# Altium PCB power-v2.2.PcbDoc (part 1 of 2)
Units mil, origin at the board's own origin, x right, y up, seen from the top; angles counter-clockwise.
Board outline 6000 x 4000 mil, 2 copper layers (Top Layer, Bottom Layer); 125 components, 68 nets, 351 pads, 6 vias.
Unrouted connection lines stored in the file: 252.
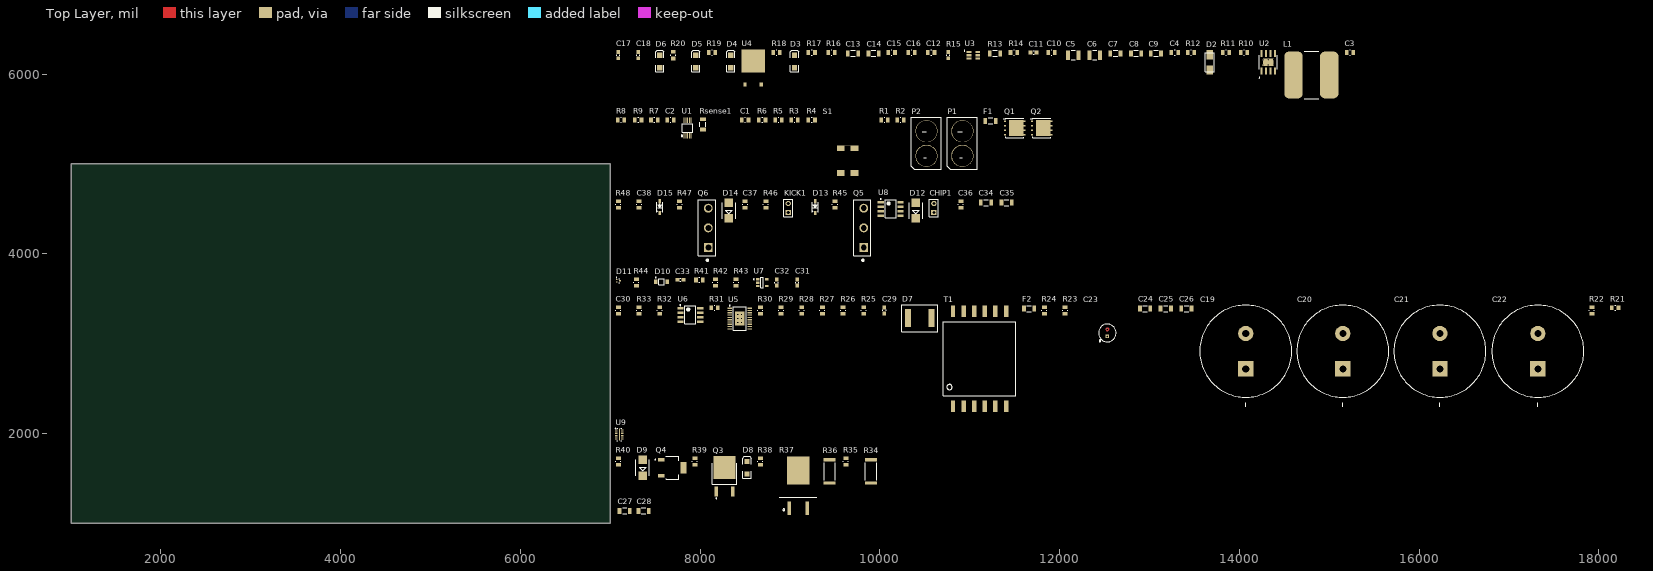
[diagram p0: Top Layer view]
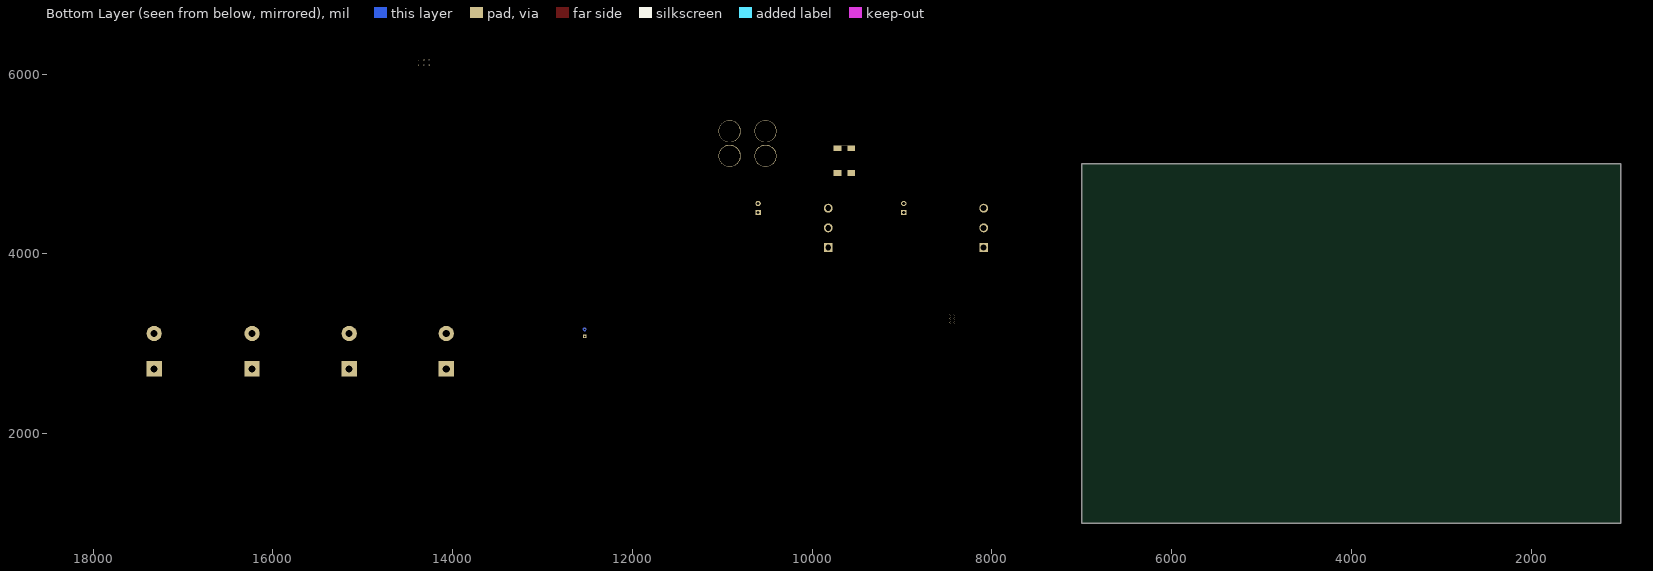
[diagram p1: Bottom Layer view, seen from below]

## Layer stack, top to bottom
Top Solder: solder mask 0.4, Solder Resist, Dk 3.5
Top Layer: signal copper 1.4
Dielectric 1: dielectric 12.6, FR-4, Dk 4.8
Bottom Layer: signal copper 1.4
Bottom Solder: solder mask 0.4, Solder Resist, Dk 3.5

## Board outline
1000,1000 7000,1000 7000,5000 1000,5000

## Design rules (kind name [scope] priority, off if disabled: settings)
BoardOutlineClearance [All] p1: gap=7.87 ignorepadtopadclearanceinfootprint=FALSE except(15.75: Arc-SplitBarrior Arc-SplitContinuation Track-SplitBarrior Track-SplitContinuation SMDPad-SplitBarrior SMDPad-SplitContinuation THPad-SplitBarrior THPad-SplitContinuation Via-SplitBarrior Via-SplitContinuation Fill-SplitBarrior Fill-SplitContinuation Poly-SplitBarrior Poly-SplitContinuation Region-SplitBarrior Region-SplitContinuation Text-SplitBarrior Text-SplitContinuation)
Clearance "Clearance Bottom Layer" [OnLayer('Bottom Layer')] p1: gap=8 ignorepadtopadclearanceinfootprint=TRUE except(10: Arc-Text Track-Text SMDPad-Text THPad-Text Via-Text Fill-Text Poly-Text Region-Text Text-Text)
Clearance "Clearance Top Layer" [OnLayer('Top Layer')] p2: gap=8 ignorepadtopadclearanceinfootprint=TRUE except(10: Arc-Text Track-Text SMDPad-Text THPad-Text Via-Text Fill-Text Poly-Text Region-Text Text-Text)
Clearance [All] p3: gap=7.87 ignorepadtopadclearanceinfootprint=FALSE except(3.5: Arc-Arc Arc-Track Arc-SMDPad Track-Track Track-SMDPad SMDPad-SMDPad; 5: Arc-Via Track-Via SMDPad-Via THPad-Via Via-Via; 10: Arc-Text Track-Text SMDPad-Text THPad-Text Via-Text Fill-Text Poly-Text Region-Text Text-Text)
HoleSize [All] p1: absolutevalues=TRUE maxlimit=248.03 minlimit=7.87 maxpercent=80.000 minpercent=20.000
MinimumAnnularRing [All] p1: minimumring=3
MinimumSolderMaskSliver [All] p1: minsoldermaskwidth=3.94
PolygonConnect PolygonConnect_1 [All] p1: thpad.connectstyle=Relief thpad.reliefconductorwidth=20 thpad.reliefentries=4 thpad.polygonreliefangle="90 Angle" thpad.airgapwidth=10 smdpad.connectstyle=Relief smdpad.reliefconductorwidth=20 smdpad.reliefentries=4 smdpad.polygonreliefangle="90 Angle" smdpad.airgapwidth=10 via.connectstyle=Direct via.reliefconductorwidth=20 via.reliefentries=4 via.polygonreliefangle="90 Angle" via.airgapwidth=10
RoomDefinition "Power Regulation" [InComponentClass('Power Regulation')] p1: confinementstyle=ConfineIn formatcopy=TRUE lockcomponents=FALSE outline 7050,5690 15310,5690 15310,6390 7050,6390
RoomDefinition "Power Input" [InComponentClass('Power Input')] p2: confinementstyle=ConfineIn formatcopy=TRUE lockcomponents=FALSE outline 7040,4770 11940,4770 11940,5640 7040,5640
RoomDefinition "Kicker and Chipper" [InComponentClass('Kicker and Chipper')] p3: confinementstyle=ConfineIn formatcopy=TRUE lockcomponents=FALSE outline 7040,3900 11510,3900 11510,4730 7040,4730
RoomDefinition HV-Measurement [InComponentClass('HV-Measurement')] p4: confinementstyle=ConfineIn formatcopy=TRUE lockcomponents=FALSE outline 7050,3600 9240,3600 9240,3860 7050,3860
RoomDefinition "Flyback Converter" [InComponentClass('Flyback Converter')] p5: confinementstyle=ConfineIn formatcopy=TRUE lockcomponents=FALSE outline 7040,2220 18280,2220 18280,3550 7040,3550
RoomDefinition "Connections and Communications" [InComponentClass('Connections and Communications')] p6: confinementstyle=ConfineIn formatcopy=TRUE lockcomponents=FALSE outline 7040,1910 7180,1910 7180,2170 7040,2170
RoomDefinition "Auto Discharge" [InComponentClass('Auto Discharge')] p7: confinementstyle=ConfineIn formatcopy=TRUE lockcomponents=FALSE outline 7040,1070 10000,1070 10000,1870 7040,1870
RoutingCorners [All] p1: cornerstyle=Round minsetback=100 maxsetback=100
RoutingVias [All] p1: holewidth=19.68 width=39.37 viastyle="Through Hole" minholewidth=7.87 minwidth=17.72 maxholewidth=39.37 maxwidth=78.74
SilkToSilkClearance [All] p1: silktosilkclearance=3.94
SilkToSolderMaskClearance [IsPad] p1: minsilkscreentomaskgap=3.94 clearancetoexposedcopper=TRUE
SolderMaskExpansion [All] p1: expansion=4 istentingtop=FALSE
Width [All] p1: maxlimit=100 minlimit=3.5 preferedwidth=15
25 further rules are at their usual default settings.

## Classes and differential pairs
component class "Power Regulation": C3 C4 C5 C6 C7 C8 C9 C10 C11 C12 C13 C14 C15 C16 C17 D2 D3 D4 D5 D6 L1 L2 R10 R11 R12 R13 R14 R15 R16 R17 R18 R19 R20 U2 U3 U4
component class "Power Input": C1 C2 D1 F1 P1 P2 Q1 Q2 R1 R2 R3 R4 R5 R6 R7 R8 R9 Rsense1 S1 U1
component class "Kicker and Chipper": C37 C38 CHIP1 D12 D13 D14 D15 KICK1 Q5 Q6 R45 R46 R47 R48 U8
component class HV-Measurement: C33 C38 D10 D11 R41 R42 R43 R44 U7
component class "Flyback Converter": C19 C20 C21 C22 C23 C24 C25 C26 C33 C38 D7 F2 R21 R22 R23 R24 R25 R26 R27 R28 R29 R30 R31 R32 R33 T1 U5 U6
component class "Connections and Communications": U9
component class "Auto Discharge": D8 D9 Q3 Q4 R34 R35 R36 R37 R38 R39 R40

## Components (designator, comment, footprint, x,y, rotation, side; value= is the part's Value field where it differs from the comment)
C1 "100nF 50V" 0805 8500,5490 r0 top value=100nF
C2 "100nF 50V" 0805 7670,5490 r0 top value=100nF
C3 "100nF 50V" 0805 15230,6240 r0 top value=100nF
C4 "8.2nF 50V" 0805 13280,6240 r0 top value=8.2nF
C5 "10uF 50V" 1210 12150,6210 r0 top value=10uF
C6 "10uF 50V" 1210 12390,6210 r0 top value=10uF
C7 "10UF 25V" 1206 12620,6230 r0 top value=10uF
C8 "10UF 25V" 1206 12850,6230 r0 top value=10uF
C9 "10UF 25V" 1206 13070,6230 r0 top value=10uF
C10 "2700pF 50V" 0805 11910,6240 r0 top value=2700pF
C11 "10pF" 0603 11710,6240 r0 top
C12 "100nF 50V" 0805 10570,6240 r0 top value=100nF
C13 "10UF 25V" 1206 9700,6230 r0 top value=10uF
C14 "10UF 25V" 1206 9930,6230 r0 top value=10uF
C15 "22uF 10V" 0805 10130,6240 r0 top value=22uF
C16 "22uF 10V" 0805 10350,6240 r0 top value=22uF
C17 "4.7uF" 0603 7090,6210 r90 top
C18 "4.7uF" 0603 7310,6210 r90 top
C19 "1000uF 250V" "RADIAL, CAN - THRU 25.4mm" 14070,2720 r90 top
C20 "1000uF 250V" "RADIAL, CAN - THRU 25.4mm" 15150,2720 r90 top
C21 "1000uF 250V" "RADIAL, CAN - THRU 25.4mm" 16230,2720 r90 top
C22 "1000uF 250V" "RADIAL, CAN - THRU 25.4mm" 17320,2720 r90 top
C23 "1000u" "RADIAL - THRU 5mm" 12530,3120 r90 top
C24 "10UF 25V" 1206 12950,3390 r0 top value=10uF
C25 "10UF 25V" 1206 13180,3390 r0 top value=10uF
C26 "10UF 25V" 1206 13410,3390 r0 top value=10uF
C27 "10UF 25V" 1206 7160,1140 r0 top value=10uF
C28 "10UF 25V" 1206 7370,1140 r0 top value=10uF
C29 "2.2uF" 0603 10050,3370 r90 top
C30 "10uF" 0805 7090,3370 r90 top
C31 "1.0uF" 0603 9080,3680 r90 top
C32 "0.010uF" 0603 8850,3680 r90 top
C33 "0.010uF" 0603 7780,3710 r0 top
C34 "10UF 25V" 1206 11180,4570 r0 top value=10uF
C35 "10UF 25V" 1206 11410,4570 r0 top value=10uF
C36 "0.1uF 25V" 0805 10900,4550 r90 top value=0.1uF
C37 "0.1uF 25V" 0805 8500,4550 r90 top value=0.1uF
C38 "0.1uF 25V" 0805 7320,4550 r90 top value=0.1uF
CHIP1 "Header 2" HDR1X2 10600,4460 r90 top
D2 "40V 3A" DO-214AC 13670,6130 r90 top
D3 "LED2" 3.2X1.6X1.1 9050,6140 r90 top
D4 "LED2" 3.2X1.6X1.1 8340,6140 r90 top
D5 "LED2" 3.2X1.6X1.1 7950,6140 r90 top
D6 "LED2" 3.2X1.6X1.1 7550,6140 r90 top
D7 "ES3J" DO-214AB 10440,3290 r0 top
D8 "LED2" 3.2X1.6X1.1 8520,1620 r90 top
D9 "3SMBJ5929B-TP" DO-214AA 7360,1620 r90 top
D10 "MMSZ4684T1G" ONSC-SOD-123-2-425-04_V 7570,3690 r0 top
D11 "ESD7L5.0DT5G" ONSC-SOT-723-3-631AA-01_V 7090,3700 r0 top
D12 "SD560BTR" DO-214AA 10400,4480 r90 top
D13 "SM5817PL-TP" SOD-123 9280,4520 r90 top
D14 "SD560BTR" DO-214AA 8320,4480 r90 top
D15 "SM5817PL-TP" SOD-123 7550,4520 r90 top
F1 "Fuse 20A 1206" 1206 11230,5480 r0 top
F2 "Fuse 20A 1206" 1206 11660,3390 r0 top
KICK1 "Header 2" HDR1X2 8980,4460 r90 top
L1 "SDR1307-150ML" INDP130130X73M 14800,5990 r0 top
P1 "XT60" XT60Connector 10750,4910 r90 top value=N/A
P2 "XT60" XT60Connector 10350,4910 r90 top value=N/A
Q1 "AON6407" 8-PowerSMD 11500,5400 r0 top
Q2 "AON6407" 8-PowerSMD 11800,5400 r0 top
Q3 "STD11N60DM2" "DPAK (TO-252)" 8270,1520 r0 top
Q4 "BSS127SSN-7" "SOT-23 (3)" 7690,1620 r0 top
Q5 "FGY75N60SMD" TO-247-3 9820,4070 r90 top
Q6 "FGY75N60SMD" TO-247-3 8090,4070 r90 top
R1 "100k" 0805 10050,5490 r0 top
R2 "100k" 0805 10230,5490 r0 top
R3 "10k" 0805 9050,5490 r0 top
R4 "10k" 0805 9240,5490 r0 top
R5 "10.0" 0805 8870,5490 r0 top
R6 "10k" 0805 8690,5490 r0 top
R7 "10.0" 0805 7490,5490 r0 top
R8 "10k" 0805 7120,5490 r0 top
R9 "10k" 0805 7310,5490 r0 top
R10 "169k" 0805 14050,6240 r0 top
R11 "10.2k" 0805 13850,6240 r0 top
R12 "10k" 0805 13460,6240 r0 top
R13 "18.7k" 1206 11280,6230 r0 top
R14 "732" 0805 11490,6240 r0 top
R15 "56.2k" 0603 10760,6210 r90 top
R16 "10k" 0805 9460,6240 r0 top
R17 "110" 0805 9240,6240 r0 top
R18 "270" 0805 8850,6240 r0 top
R19 "1k" 0805 8130,6240 r0 top
R20 "1.96K" 0805 7700,6210 r90 top value=1.96k
R21 "174k" 0805 18180,3400 r0 top
R22 "255k" 0805 17920,3370 r90 top
R23 "330k" 0805 12060,3370 r90 top
R24 "495k" 0805 11830,3370 r90 top
R25 "25.5k" 0805 9820,3370 r90 top
R26 "100k" 0805 9590,3370 r90 top
R27 "100k" 0805 9360,3370 r90 top
R28 "100k" 0805 9130,3370 r90 top
R29 "10k" 0805 8900,3370 r90 top
R30 "11.5k" 0805 8670,3370 r90 top
R31 "25.5k" 0805 8160,3400 r0 top
R32 "16m" 0805 7550,3370 r90 top
R33 "1.05k" 0805 7320,3370 r90 top
R34 "18k 1W" 2512 9900,1580 r90 top value=18k
R35 "5.1M" 0805 9620,1690 r90 top
R36 "18k 1W" 2512 9440,1580 r90 top value=18k
R37 "1k 50W" "D2PAK (TO-263)" 9090,1420 r0 top value=1.5k
R38 "5.1M" 0805 8670,1690 r90 top
R39 "270k" 0805 7940,1690 r90 top
R40 "100k" 0805 7090,1690 r90 top
R41 "330k" 0805 7990,3710 r0 top
R42 "330k" 0805 8170,3680 r90 top
R43 "330k" 0805 8400,3680 r90 top
R44 "13k" 0805 7290,3680 r90 top
R45 "110" 0805 9500,4550 r90 top
R46 "10k" 0805 8730,4550 r90 top
R47 "110" 0805 7770,4550 r90 top
R48 "10k" 0805 7090,4550 r90 top
Rsense1 "2mOHM" 1206 8030,5440 r90 top
S1 "SPST 10A 125V" "SWITCH ROCKER SPST 10A 125V" 9640,4900 r0 top
T1 "DA2034" DA2034 11130,2850 r90 top
U1 "INA226AIDGSR" 10-VSSOP 7860,5400 r90 top
U2 "TPS54531DDA" 8-PowerSOIC 14320,6130 r90 top
U3 "TPS563200DDCR" TSOT-23-6 11040,6210 r0 top
U4 "ZLDO1117K33TC" TO-252-3 8590,6140 r0 top
U5 "LT3751EFE#PBF" LT-FE-20-EPV-CB_L 8440,3280 r0 top
U6 "FDS2582" "8-SOIC MOSFET" 7890,3320 r0 top
U7 "MIC7300YM5-TR" FP-SOT23-5LD-PL-1-MFG 8690,3680 r0 top
U8 "IR4427STRPBF" 8-SOIC 10120,4500 r0 top
U9 "TPD6F002DSVR" PSON50P140X80_HS-13N 7100,1990 r0 top

## Footprints (in the part's own frame and the unit in brackets; to place one, negate y for a bottom-side part, rotate by r counter-clockwise, add the part's x,y. Pads: shape width x height; smd on the part's side, far side on the other; paste and mask are expansions set on the pad)
3.2X1.6X1.1 [mm]
  rect 1.5x1.5 smd: 1(-1.75,0) 2(1.75,0)
  silkscreen extent -2.9,-1.15 3.2,1.15
8-PowerSMD [mm]
  rect 4.12x4.6 smd: 9(0.46,0)
  rect 0.55x0.5 smd: D(2.795,-1.905) D(2.795,-0.635) D(2.795,0.635) D(2.795,1.905)
  rect 0.65x0.5 smd: G(-2.75,-1.905) S(-2.75,-0.635) S(-2.75,0.635) S(-2.75,1.905)
  silkscreen extent -3.13,-2.75 2.6,2.75
8-PowerSOIC [mm]
  rect 1.97x0.6 smd: 1(-2.475,1.905) 2(-2.475,0.635) 3(-2.475,-0.635) 4(-2.475,-1.905) 5(2.475,-1.905) 6(2.475,-0.635) 7(2.475,0.635) 8(2.475,1.905)
  rect 2.13x3 smd: 9(0,0)
  round 0.4 hole 0.3: V1(-0.75,1.5) V2(0.75,1.5) V3(-0.75,0) V4(0.75,0) V5(-0.75,-1.5) V6(0.75,-1.5)
  silkscreen extent -4.42,-2.52 2,2.6, body extent -3.1,-2.49 3.1,2.49, height 1.68
8-SOIC [mm]
  rect 1.75x0.65 smd: 1(-2.8,1.905) 2(-2.8,0.635) 3(-2.8,-0.635) 4(-2.8,-1.905) 5(2.8,-1.905) 6(2.8,-0.635) 7(2.8,0.635) 8(2.8,1.905)
  silkscreen extent -2.92,-2.55 1.6,2.9, body extent -2,-2.55 2,2.55, height 1.7
"8-SOIC MOSFET" [mm]
  rect 1.75x0.65 smd: D(2.8,-1.905) D(2.8,-0.635) D(2.8,0.635) D(2.8,1.905) G(-2.8,-1.905) S(-2.8,-0.635) S(-2.8,0.635) S(-2.8,1.905)
  silkscreen extent -2.92,-2.55 1.6,2.9, body extent -2,-2.55 2,2.55, height 1.7
10-VSSOP [mm]
  rect 1.45x0.3 smd: 1(-2.2,1) 2(-2.2,0.5) 3(-2.2,0) 4(-2.2,-0.5) 5(-2.2,-1) 6(2.2,-1) 7(2.2,-0.5) 8(2.2,0) 9(2.2,0.5) 10(2.2,1)
  silkscreen extent -2.42,-1.5 1.15,1.82
0603 [mm]
  rect 1.1x1 smd: 1(-0.85,0) 2(0.85,0)
  silkscreen extent -0.15,-0.45 0.15,0.45
0805 [mil]
  rect 40x55 smd: 1(-37,0) 2(37,0)
  silkscreen extent -4,-28 4,28
1206 [mm]
  rect 1.05x1.72 smd: 1(-1.46,0) 2(1.46,0)
  silkscreen extent -0.62,-0.85 0.62,0.85
1210 [mm]
  rect 1.16x2.72 smd: 1(-1.475,0) 2(1.475,0)
  silkscreen extent -0.57,-1.35 0.57,1.35
2512 [mm] "Chip Resistor, 2-Leads, Body 6.35x3.10mm, IPC Low Density"
  rect 0.95x3.35 smd: 1(-3.3,0) 2(3.3,0)
  silkscreen extent -2.45,-1.58 2.45,1.58, body extent -3.22,-1.63 3.22,1.63, height 0.6
"D2PAK (TO-263)" [mm]
  rect 1.06x3.78 smd: 1(-2.54,-6.4) 2(2.54,-6.4)
  rect 6.39x8 smd paste-5 mask+0: 3(0,4.29)
  silkscreen extent -5.34,-7.05 5.32,-3.24, body extent -5.08,-7.62 5.08,7.62, height 4.83
DA2034 [mm]
  rect 3.3x1.27 smd: 1(-13.892,8.059) 2(-13.892,5.059) 3(-13.892,2.059) 4(-13.892,-0.941) 5(-13.892,-3.941) 6(-13.892,-6.941) 7(13.028,-6.941) 8(13.028,-3.941) 9(13.028,-0.941) 10(13.028,2.059) 11(13.028,5.059) 12(13.028,8.059)
  silkscreen extent -10.93,-9.73 10.07,10.85, body extent -15.41,-9.68 14.59,10.89, height 11.43
DO-214AA [mm]
  rect 2.4x2.4 smd: A(2.2,0) C(-2.2,0)
  silkscreen extent -2.26,-1.91 2.26,1.91
DO-214AB [mil]
  rect 70x200 smd: IN(-126.89,-4.41) OUT(133.11,-4.41)
  silkscreen extent -197,-154 203,146
DO-214AC [mm]
  rect 2.65x1.75 smd: A(-2.15,0) C(2.15,0)
  silkscreen extent -2.7,-1.25 2.7,1.25
"DPAK (TO-252)" [mil]
  rect 38.58x107.87 smd: 1(-90,-165) 3(90,-165)
  rect 241.67x251.97 smd paste-157.48: 2(0,103)
  silkscreen extent -135,-244 135,150, body extent -128,-185 128,205, height 97
FP-SOT23-5LD-PL-1-MFG [mm]
  rect 1x0.66 smd paste+0 mask+0: 1(-1.3,0.95) 2(-1.3,0) 3(-1.3,-0.95) 4(1.3,-0.95) 5(1.3,0.95)
  silkscreen extent -2.47,-1.5 0.35,1.5, body extent -1.9,-1.6 1.9,1.6, height 0.25
HDR1X2 [mm] "Connector; Header; 2 Position"
  rect 1.5x1.5 hole 0.9: 1(0,0)
  round 1.5 hole 0.9: 2(2.54,0)
  silkscreen extent -1.27,-1.27 3.81,1.27
INDP130130X73M [mm] "Precision Wire Wound Inductor, 2-Leads, Body 13.00x13.00mm, IPC Low Density"
  rrect50% 5.2x13.2 smd: 1(-5.05,0) 2(5.05,0)
  silkscreen extent -2.05,-6.75 2.05,6.75, body extent -6.5,-6.5 6.5,6.5, height 7
LT-FE-20-EPV-CB_L [mm] "SOP, 20-Leads, Body 6.6x4.5mm, Pitch 0.65mm, Thermal Pad 3.86x2.74mm, IPC High Density"
  oval 1.25x0.35 smd: 1(-2.825,2.925) 2(-2.825,2.275) 3(-2.825,1.625) 4(-2.825,0.975) 5(-2.825,0.325) 6(-2.825,-0.325) 7(-2.825,-0.975) 8(-2.825,-1.625) 9(-2.825,-2.275) 10(-2.825,-2.925) 11(2.825,-2.925) 12(2.825,-2.275) 13(2.825,-1.625) 14(2.825,-0.975) 15(2.825,-0.325) 16(2.825,0.325) 17(2.825,0.975) 18(2.825,1.625) 19(2.825,2.275) 20(2.825,2.925)
  rect 2.74x3.86 smd: 21(0,0)
  silkscreen extent -2.95,-3.3 1.8,3.77, body extent -2.25,-3.3 2.25,3.3, height 1.2
ONSC-SOD-123-2-425-04_V [mm] "SOD, 2-Leads, Body 2.69x1.6mm"
  rect 0.91x1.22 smd: 1(-1.635,0) 2(1.635,0)
  silkscreen extent -1.76,-0.8 0.78,1.28, body extent -1.35,-0.8 1.35,0.8, height 1.35
ONSC-SOT-723-3-631AA-01_V [mm] "SOT223, 3-Leads, Body 1.2x0.8mm, Pitch 0.4mm"
  rect 0.52x0.27 smd: 1(-0.49,0.4) 2(-0.49,-0.4)
  rect 0.52x0.36 smd: 3(0.49,0)
  silkscreen extent -0.54,-0.6 0.4,0.98, body extent -0.4,-0.6 0.4,0.6, height 0.55
PSON50P140X80_HS-13N [mm] "PSON, 12-Leads, Body 3.00x1.35mm, Pitch 0.50mm, Thermal Pad 3.05x0.31mm, IPC Medium Density"
  rect 0.7x0.3 smd: 1(-0.8,1.25) 2(-0.8,0.75) 3(-0.8,0.25) 4(-0.8,-0.25) 5(-0.8,-0.75) 6(-0.8,-1.25) 7(0.8,-1.25) 8(0.8,-0.75) 9(0.8,-0.25) 10(0.8,0.25) 11(0.8,0.75) 12(0.8,1.25)
  rect 0.31x3.4 smd: 13(0,0)
  silkscreen extent -1.17,-1.7 0.72,1.75, body extent -0.72,-1.55 0.72,1.55, height 0.8
"RADIAL - THRU 5mm" [mm] "Through Hole"
  rect 1.008x1.008 hole 0.5: NEG(-1,0)
  round 0.5 hole 0.5: POS(1,0)
  Top Layer region: 1.474,0.172 1.213,0.457 0.828,0.474 0.543,0.213 0.526,-0.172 0.787,-0.457 1.172,-0.474 1.457,-0.213
  Bottom Layer region: 1.474,0.172 1.213,0.457 0.828,0.474 0.543,0.213 0.526,-0.172 0.787,-0.457 1.172,-0.474 1.457,-0.213
  Multi-Layer region: 1.474,0.172 1.213,0.457 0.828,0.474 0.543,0.213 0.526,-0.172 0.787,-0.457 1.172,-0.474 1.457,-0.213
  silkscreen extent -2.5,-2.5 2.5,2.5
"RADIAL, CAN - THRU 25.4mm" [mil]
  rect 170x170 hole 78.74: NEG(0,0)
  round 170 hole 78.74: POS(393.7,0)
  silkscreen extent -419,-512 709,512
SOD-123 [mil]
  rect 48x30 smd: A(66,0) C(-66,0)
  silkscreen extent -56,-36 56,36
"SOT-23 (3)" [mm]
  rect 1.76x0.93 smd: 1(-3.125,2.3) 3(-3.125,-2.3)
  rect 1.76x3.19 smd: 2(3.125,0)
  silkscreen extent -4.9,-3.25 1.75,3.25
"SWITCH ROCKER SPST 10A 125V" [mm]
  rect 6.1x1.6 hole 1.5 square: 0(0,0) 1(0,7)
  body extent -7.3,-3.1 7.3,15.9, height 13.69
TO-247-3 [mm]
  rect 2.52x2.52 hole 1.68: 1(0,0)
  round 2.52 hole 1.68: 2(5.56,0) 3(11.12,0)
  silkscreen extent -3.85,-2.04 13.5,2.78
TO-252-3 [mil]
  rect 35x48 smd: 1(-90,-256) 3(90,-256)
  rect 265x256 smd: 2(0,6)
TSOT-23-6 [mm] "SOT-23-6 Thin"
  rect 1.3x0.6 smd: 1(-1.255,0.95) 2(-1.255,0) 3(-1.255,-0.95) 4(1.255,-0.95) 5(1.255,0) 6(1.255,0.95)
  silkscreen extent -2.6,1.15 -2.4,1.35, body extent -1.4,-1.45 1.4,1.45, height 0.97
XT60Connector [mm]
  round 6.25 hole 6: 1(4.572,-4.25) 2(11.55,-4.25)
  silkscreen extent 0.76,-8.5 15.5,0

## Part data
C1 C2 C3 C12: library part "CAP 100nF 50V", "CAP CER 0.1UF 50V X7R 0805", Package=0805, Rating=50V, Tolerance=10%
C4: library part "CAP 8.2nF 50V", "CAP CER 8200PF 50V X7R 0805", Operating Temperature="-55°C ~ 125°C", Package=0805, Rating=50V, Temperature Coefficient=X7R, Tolerance=10%
C5 C6: library part "CAP 10uF 50V", "CAP CER 10UF 50V X7R", Package=1210, Rating=50V, Tolerance=10%, ComponentLink1Description=digikey, ComponentLink1URL=https://www.digikey.ca/en/products/detail/kemet/C1210C106M5RACTU/4918883
C7 C8 C9 C13 C14 C24 C25 C26 C27 C28 C34 C35: library part "CAP 10uF 25V", "CAP CER 10UF 25V X5R 1206", Operating Temperature="-55°C ~ 85°C", Package=1206, Rating=25V, Temperature Coefficient=X5R, Tolerance=10%
C10: library part "CAP 2700pF 50V", "CAP CER 2700PF 50V X7R 0805", Operating Temperature="-55°C ~ 125°C", Package=0805, Rating=50V, Temperature Coefficient=X7R, Tolerance=10%
C11: library part "CAP 10pF 50V", "CAP CER 10PF 50V X7R 0603/0805", Operating Temperature="-55°C ~ 125°C", Package=0603/0805, Rating=50V, Temperature Coefficient=X7R, Tolerance=10%
C15 C16: library part "CAP 22uF 10V", "CAP CER 2.2UF 10V X5R 0805", Operating Temperature="-55°C ~ 85°C", Package=0805, Rating=10V, Temperature Coefficient=X5R, Tolerance=20%
C17 C18: library part "CAP 4.7uF 6.3V", "CAP CER 4.7UF 6.3V X5R 0603/0805", Operating Temperature="-55°C ~ 85°C", Package=0603/0805, Rating=6.3V, Temperature Coefficient=X5R, Tolerance=10%
C19 C20 C21 C22: library part "CAP POL 1000uF", "United Chemi-Con / ESMQ251VSN102MQ45S", Capacitance=1mF, Case/Package=Radial, Dielectric Material=Aluminium, Manufacturer="United Chemi-Con", Manufacturer Part Number=ESMQ251VSN102MQ45S, Max Operating Temperature=85°C, Min Operating Temperature=-40°C, Ripple Current=960mA, Supplier Part Number 1=565-2754-ND, Tolerance=20%, Voltage=250V, Diameter=25.4mm, Height - Seated (Max)=45mm, Lead Diameter=2mm, Lead Free="Lead Free", Lead Pitch=10mm, Life (Hours)=2000Hour, Mount="Through Hole,PCB", Number of Pins=2, REACH SVHC="No SVHC", RoHS=Yes, Supplier 1=Digi-Key, Termination=Radial
C23: library part "CAP POL 1000uF TH", "NICHICON   UVR1E102MPD1TD   ALUMINUM ELECTROLYTIC CAPACITOR, 1000UF, 25V, 20%, RADIAL, FULL REEL", Capacitance=1mF, Case/Package=Radial, Dielectric Material=Aluminium, Leakage Current=750uA, Manufacturer=Nichicon, Manufacturer Part Number=UVR1E102MPD1TD, Max Operating Temperature=85°C, Min Operating Temperature=-40°C, Package Quantity=500, Ripple Current=960mA, Supplier Part Number 1=493-5913-1-ND, Tolerance=20%, Voltage=25V, Category="Aluminum Electrolytic Capacitors", ComponentLink1Description=https://datasheet.ciiva.com/7851/e-vr-7851718.pdf?src-supplier=Element14, ComponentLink1URL=https://datasheet.ciiva.com/7851/e-vr-7851718.pdf?src-supplier=Element14, ComponentLink2Description=https://datasheet.ciiva.com/6300/e-vr-6300009.pdf?src-supplier=Digi-Key, ComponentLink2URL=https://datasheet.ciiva.com/6300/e-vr-6300009.pdf?src-supplier=Digi-Key, ComponentLink3Description=https://datasheet.ciiva.com/6300/e-vr-6300010.pdf?src-supplier=Digi-Key, ComponentLink3URL=https://datasheet.ciiva.com/6300/e-vr-6300010.pdf?src-supplier=Digi-Key, ComponentLink4Description=https://datasheet.ciiva.com/11684/e-vr-11684106.pdf?src-supplier=Avnet, ComponentLink4URL=https://datasheet.ciiva.com/11684/e-vr-11684106.pdf?src-supplier=Avnet, ComponentLink5Description=https://datasheet.ciiva.com/16502/e-vr-16502813.pdf?src-supplier=Future+Electronics, ComponentLink5URL=https://datasheet.ciiva.com/16502/e-vr-16502813.pdf?src-supplier=Future+Electronics, ComponentLink6Description=https://datasheet.ciiva.com/46381/1909356-46381757.pdf?src-supplier=Element14, ComponentLink6URL=https://datasheet.ciiva.com/46381/1909356-46381757.pdf?src-supplier=Element14, Diameter=10mm, Dissipation Factor=0.16%, Height=20mm, Height - Seated (Max)=0.866inch, Lead Diameter=0.6mm, Lead Free="Lead Free", Lead Pitch=5mm, Length=20mm, Life (Hours)=2000Hour, Mount="Through Hole,PCB", Number of Pins=2, Packaging="Tape and Reel", Pricing 1="1=0.58000, 10=0.40800, 100=0.26890 (USD)", Radiation Hardening=No, REACH SVHC="No SVHC", RoHS=Yes, Stock 1=43448, Supplier 1=Digi-Key, Termination=Radial, Voltage Rating=25V, Voltage Rating (DC)=25V
C29: library part "CAP 2.2uF 16V", "CAP CER 2.2UF 16V X5R 0603/0805", Operating Temperature="-55°C ~ 85°C", Package=0603/0805, Rating=16V, Temperature Coefficient=X5R, Tolerance=10%
C30: library part "CAP 10uF 35V", "CAP CER 10UF 35V X7R 0805", Operating Temperature="-55°C ~ 125°C", Package=0805, Rating=35V, Temperature Coefficient=X7R, Tolerance=10%
C31: library part "CAP 1.0uF 16V", "CAP CER 1.0UF 16V X5R 0603/0805", Operating Temperature="-55°C ~ 85°C", Package=0603/0805, Rating=16V, Temperature Coefficient=X5R, Tolerance=10%
C32 C33: library part "CAP 0.010uF 16V", "CAP CER 0.010UF 16V X5R 0603/0805", Operating Temperature="-55°C ~ 85°C", Package=0603/0805, Rating=16V, Temperature Coefficient=X5R, Tolerance=10%
C36 C37 C38: library part "CAP 0.1uF 25V", "CAP CER 0.1UF 25V X7R 0805", Operating Temperature="-55°C ~ 125°C", Rating=25V, Temperature Coefficient=X7R, Tolerance=10%
CHIP1 KICK1: "Header, 2-Pin", LatestRevisionDate=17-Jul-2002, LatestRevisionNote="Re-released for DXP Platform.", Publisher="Altium Limited"
D2: library part "DIODE SCHOTTKY 40V 3A", "Diode Schottky 40V 3A Surface Mount SMA", Current - Average Rectified (Io)=3A, Package=DO-214AC, Voltage - DC Reverse (Vr) (Max)=40V, Voltage - Forward (Vf) (Max) @ If="450mV @ 3A", ComponentLink1Description=digikey, ComponentLink1URL=https://www.digikey.ca/product-detail/en/on-semiconductor/MBR0540T1G/MBR0540T1GOSCT-ND/917967
D3 D4 D5 D6: library part "LED GREEN SMD", "Typical RED, GREEN, YELLOW, AMBER GaAs LED", Color=Green, Current - Test=20mA, Package=1206, Voltage - Forward (Vf) (Typ)=2V, Lens Transparency=Clear
D7: "Diode Switching 600V 3A 2-Pin DO-214AB T/R", Average Rectified Current=3A, Capacitance=45pF, Case/Package=SMC, Forward Voltage=1.7V, Manufacturer="ON Semiconductor / Fairchild", Max Forward Surge Current (Ifsm)=100A, Max Operating Temperature=150°C, Max Repetitive Reverse Voltage (Vrrm)=600V, Min Operating Temperature=-50°C, Package Quantity=3000, Peak Reverse Current=10uA, Power Dissipation=1.66W, Supplier Part Number 1=ES3JCT-ND, Category="Zener Diodes", ComponentLink1Description=https://datasheet.ciiva.com/4452/es3j-187547-4452440.pdf?src-supplier=Mouser, ComponentLink1URL=https://datasheet.ciiva.com/4452/es3j-187547-4452440.pdf?src-supplier=Mouser, ComponentLink2Description=https://datasheet.ciiva.com/30479/0900766b810e1d0b-30479500.pdf?src-supplier=RSComponents, ComponentLink2URL=https://datasheet.ciiva.com/30479/0900766b810e1d0b-30479500.pdf?src-supplier=RSComponents, ComponentLink3Description=https://datasheet.ciiva.com/22651/1856389-22651960.pdf?src-supplier=Element14, ComponentLink3URL=https://datasheet.ciiva.com/22651/1856389-22651960.pdf?src-supplier=Element14, ComponentLink4Description=https://datasheet.ciiva.com/26230/es3j-26230952.pdf?src-supplier=Avnet+Europe, ComponentLink4URL=https://datasheet.ciiva.com/26230/es3j-26230952.pdf?src-supplier=Avnet+Europe, ComponentLink5Description=https://datasheet.ciiva.com/911/es3a-911003.pdf?src-supplier=Digi-Key, ComponentLink5URL=https://datasheet.ciiva.com/911/es3a-911003.pdf?src-supplier=Digi-Key, ComponentLink6Description=https://datasheet.ciiva.com/911/es3a-911004.pdf?src-supplier=Digi-Key, ComponentLink6URL=https://datasheet.ciiva.com/911/es3a-911004.pdf?src-supplier=Digi-Key, ComponentLink7Description=https://datasheet.ciiva.com/23683/1856389-23683564.pdf?src-supplier=Newark, ComponentLink7URL=https://datasheet.ciiva.com/23683/1856389-23683564.pdf?src-supplier=Newark, ComponentLink8Description=https://datasheet.ciiva.com/17194/es3j-17194703.pdf?src-supplier=Future+Electronics, ComponentLink8URL=https://datasheet.ciiva.com/17194/es3j-17194703.pdf?src-supplier=Future+Electronics, ComponentLink9Description=https://datasheet.ciiva.com/7965/1856389-7965165.pdf?src-supplier=Element14, ComponentLink9URL=https://datasheet.ciiva.com/7965/1856389-7965165.pdf?src-supplier=Element14, ComponentLink10Description=https://datasheet.ciiva.com/8300/es3j-8300861.pdf?src-supplier=Avnet, ComponentLink10URL=https://datasheet.ciiva.com/8300/es3j-8300861.pdf?src-supplier=Avnet, Contact Plating=Tin,Matte, Current=3A, Current Rating=3A, Element Configuration=Single, Forward Current=3A, Height=2.616mm, Lead Free="Lead Free", Length=7.11mm, Manufacturer Part Number=ES3J, Max Reverse Voltage (DC)=600V, Max Surge Current=100A, Mount="Surface Mount", Number of Pins=2, Output Current=3A, Packaging="Tape and Reel", Peak Non-Repetitive Surge Current=100A, Polarity=Standard, Pricing 1="1=0.47000, 10=0.37800, 25=0.34600, 100=0.21740, 250=0.21492, 500=0.20126, 1000=0.13685 (USD)", Radiation Hardening=No, REACH SVHC="No SVHC", Recovery Time=35ns, Reverse Recovery Time=35ns, Reverse Voltage=600V, RoHS=Yes, Stock 1=20740, Supplier 1=Digi-Key, Voltage=600V, Voltage Rating (DC)=600V, Width=6.223mm
D8: library part "LED RED SMD", "Typical RED, GREEN, YELLOW, AMBER GaAs LED", Color=Red, Current - Test=20mA, Lens Color=Colorless, Package=1206, Voltage - Forward (Vf) (Typ)=1.7V, Lens Transparency=Clear
D9: library part "DIODE ZENER 15V 3W", "Diode ZENER 15V 3W", Supplier Part Number 1=3SMBJ5929BTPMSCT-ND, Supplier 1=Digi-Key
D10: library part CMP-1060-00618-1, "Zener Voltage Regulator, 500 mW, 2-Pin SOD-123, Pb-Free, Tape and Reel", Manufacturer="On Semiconductor", ComponentLink1Description="Manufacturer URL", ComponentLink1URL=http://www.onsemi.com/, ComponentLink2Description=Datasheet, ComponentLink2URL=http://www.onsemi.com/pub_link/Collateral/MMSZ4678T1-D.PDF, ComponentLink3Description="Package Specification", ComponentLink3URL=http://www.onsemi.com/pub_link/Collateral/425-04.PDF, DatasheetVersion="Rev. 9", Mounting Technology="Surface Mount", P Max (W)=0.5, PackageDescription="2-Pin SOD, Body 1.6 x 2.69 mm", PackageReference=SOD-123-2-425-04, PackageVersion="Rev. G, 10/2009", Packing="Tape and Reel", PartNumber=MMSZ4684T1G, RoHS=Pb-Free, VZ Typ (V)=3.3
D11: library part CMP-1063-00213-1, "Transient Voltage Suppressor, ESD Protection Diode with Ultra-Low Capacitance, 3-Pin SOT-723, Pb-Free, Tape and Reel", Manufacturer="On Semiconductor", ComponentLink1Description="Manufacturer URL", ComponentLink1URL=http://www.onsemi.com/, ComponentLink2Description=Datasheet, ComponentLink2URL=http://www.onsemi.cn/pub_link/Collateral/ESD7L-D.PDF, ComponentLink3Description="Package Specification", ComponentLink3URL=http://www.onsemi.com/pub_link/Collateral/631AA.PDF, DatasheetVersion="Rev. 6", Direction=Unidirectional, IR Max (uA)=1, Mounting Technology="Surface Mount", Number of Lines=2, PackageDescription="3-Pin Small Outline Transistor, Body 1.2 x 0.8 mm, Pitch 0.4 mm", PackageReference=SOT-723-3-631AA-01, PackageVersion="Rev. D, 08/2009", Packing="Tape and Reel", PartNumber=ESD7L5.0DT5G, RoHS=Pb-Free, V(BR) Min (V)=5.4, VRWM Max (V)=5
D12 D14: library part "DIODE STANDARD 600V 5A", "Diode Standard 600V 5A Surface Mount SMB", Supplier Part Number 1=1655-1530-1-ND, Supplier 1=Digi-Key
D13 D15: library part "DIODE SCHOTTKY 20V 1A", "Diode Schottky 20V 1A Surface Mount SOD-123FL", Current Rating=1A, Package=SOD-123, Voltage Rating=20V, ComponentLink1Description=digikey, ComponentLink1URL=https://www.digikey.ca/product-detail/en/on-semiconductor/MBR0540T1G/MBR0540T1GOSCT-ND/917967, Digikey=SM5817PL-TPMSCT-ND, Digikey Link=https://www.digikey.ca/product-detail/en/micro-commercial-co/SM5817PL-TP/SM5817PL-TPMSCT-ND/1793410, MF="Micro Commercial Co", MP=SM5817PL-TP
F1 F2: library part "FUSE 20A 63V SLOW", "FUSE 20A 32V AC 63V DC 1206", Current Rating (Amps)=20A, Operating Temperature="-55°C ~ 90°C", Voltage Rating - AC=32V, Voltage Rating - DC=63V, Response Time="Slow Blow"
L1: library part "IND 15UH 4.5A 34 MOHM", "15µH Unshielded Wirewound Inductor 4.5A 34mOhm Max Nonstandard", Current - Saturation=7.5A, DC Resistance (DCR)=34mOhm, Inductance=15.0uH, Operating Temperature="-40°C ~ 125°C", ComponentLink1Description=digikey, ComponentLink1URL=https://www.digikey.ca/en/products/detail/bourns-inc/SRU1048-8R2Y/2352912, Digikey=SDR1307-150MLCT-ND, Digikey Link=https://www.digikey.ca/en/products/detail/bourns-inc/SDR1307-150ML/2561929, Height - Seated (Max)="0.287\"\" (7.30mm)", MF="Bourns Inc.", MP=SDR1307-150ML, Size / Dimension="0.512\"\" L x 0.512\"\" W (13.00mm x 13.00mm)"
P1 P2: library part "XT60 Connector", "XT60 CONNECTORS FEMALE PAIR", Supplier Part Number 1=1568-1816-ND, Digikey=1568-1816-ND, Digikey Link=https://www.digikey.ca/product-detail/en/sparkfun-electronics/PRT-10474/1568-1816-ND/8258064, MF="SparkFun Electronics", MP=PRT-10474, Package=XT60, Price="2.13000 CAD", Supplier 1=Digi-Key
Q1 Q2: library part "MOSFET AON6407", "MOSFET P-CH 30V 32A 8DFN", Package=8-PowerSMD, Supplier Part Number 1=785-1421-1-ND, Digikey=785-1421-1-ND, Digikey Link=https://www.digikey.ca/product-detail/en/alpha-omega-semiconductor-inc/AON6407/785-1421-1-ND/3466800, MF="Alpha & Omega Semiconductor Inc.", MP=AON6407, Supplier 1=Digi-Key
Q4: "Small Signal N-Ch, 600Vds", MFG="Diodes Incorporated", Supplier=Digikey, Supplier PN=BSS127SSN-7DICT-ND
Q5 Q6: "IGBT Field Stop 600V 150A 750W Through Hole PowerTO-247-3", Package="TO-247 Fairchild Semiconductor", Power=750W, Supplier Part Number 1=FGY75N60SMDFS-ND, Ic max=150A, MF="ON Semiconductor", MP=FGY75N60SMD, Supplier 1=Digi-Key, Topology="Field Stop IGBT", Vce max=600V, Vge max=±20V
R1 R2 R26 R27 R28 R40: library part "RES 100k 1/8W - 1%", "RES SMD 100K OHM 1% 1/8W 0805", Package=0805, Power (Watts)=0.125W, Tolerance=1%
R3 R4 R6 R8 R9 R12 R16 R29 R46 R48: library part "RES 10k 1/8W - 1%", "RES SMD 10K OHM 1% 1/8W 0805", Package=0805, Power (Watts)=0.125W, Tolerance=1%
R5 R7: library part "RES 10.0 1/8W - 1%", "RES SMD 10.0 OHM 1% 1/8W 0805", Package=0805, Power (Watts)=0.125W, Tolerance=1%
R10: library part "RES 169k 1/8W", "RES SMD 169K OHM 1% 1/8W 0805", Package=0805, Power (Watts)=0.125W, Tolerance=1%, ComponentLink1Description=digikey, ComponentLink1URL=https://www.digikey.ca/en/products/detail/yageo/RC0805FR-07169KL/727634
R11: library part "RES 10.2k 1/8W", "RES SMD 10.2K OHM 1% 1/8W 0805", Package=0805, Power (Watts)=0.125W, Tolerance=1%, ComponentLink1Description=digikey, ComponentLink1URL=https://www.digikey.ca/en/products/detail/panasonic-electronic-components/ERJ-6ENF1022V/111476
R13: library part "RES 18.7K 1/8W", "RES SMD 18.7K OHM 1% 1/8W 0805", Alternative Package=1206, Package=0805, Power (Watts)=0.125W, Tolerance=1%
R14: library part "RES 732.0 1/8W", "RES SMD 732 OHM 1% 1/8W 0805", Package=0805, Power (Watts)=0.125W, Tolerance=1%
R15: library part "RES 56.2k 1/10W", "RES SMD 56.2K OHM 1% 1/10W 0603", Package=0603, Power (Watts)=0.1W, Tolerance=1%
R17 R45 R47: library part "RES 110.0 1/8W - 1%", "RES SMD 110 OHM 1% 1/8W 0805", Package=0805, Power (Watts)=0.125W, Tolerance=1%
R18: library part "RES 270.0 1/8W", "RES SMD 270 OHM 5% 1/8W 0805", Package=0805, Power (Watts)=0.125W, Tolerance=5%
R19: library part "RES 1k 1/8W", "RES SMD 1K OHM 5% 1/8W 0805", Package=0805, Power (Watts)=0.125W, Tolerance=5%
R20: library part "RES 1.96k 1/8W", "RES SMD 1.96K OHM 1% 1/8W 0805", Package=0805, Power (Watts)=0.125W, Tolerance=1%
R21: library part "RES 174k 1/8W", "RES SMD 174K OHM 1% 1/8W 0805", Case Code (Imperial)=0805, Case Code (Metric)=2012, Manufacturer=Yageo, Manufacturer Part Number=RC0805FR-07174KL, Max Operating Temperature=155°C, Max Power Dissipation=125mW, Min Operating Temperature=-55°C, Package Quantity=1, Resistance=174kR, Supplier Part Number 1=311-174KCRCT-ND, Temperature Coefficient=100ppm/°C, Tolerance=1%, Voltage Rating=150V, Case/Package=0805, Category="Chip SMD Resistors", ComponentLink1Description=https://datasheet.ciiva.com/2509/pyu-r-int-thick-7-2509472.pdf?src-supplier=Digi-Key, ComponentLink1URL=https://datasheet.ciiva.com/2509/pyu-r-int-thick-7-2509472.pdf?src-supplier=Digi-Key, ComponentLink2Description=https://datasheet.ciiva.com/2509/pyu-r-int-thick-7-2509471.pdf?src-supplier=Digi-Key, ComponentLink2URL=https://datasheet.ciiva.com/2509/pyu-r-int-thick-7-2509471.pdf?src-supplier=Digi-Key, ComponentLink3Description=https://datasheet.ciiva.com/2509/pyu-r-int-thick-7-2509473.pdf?src-supplier=Digi-Key, ComponentLink3URL=https://datasheet.ciiva.com/2509/pyu-r-int-thick-7-2509473.pdf?src-supplier=Digi-Key, Composition="Thick Film", Contact Plating=Tin,Matte, Depth=1.25mm, Features="Moisture Resistant", Height=0.024inch, Lead Free="Lead Free", Length=2mm, Military Standard=Not, Number of Terminations=2, Packaging="Tape and Reel", Power Rating=125mW, Pricing 1="1=0.10000, 10=0.04000, 100=0.01630, 1000=0.00731, 2500=0.00635 (USD)", Radiation Hardening=No, RoHS=Yes, Stock 1=27863, Supplier 1=Digi-Key, Termination=SMD/SMT, Voltage Rating (DC)=150V, Width=0.049inch
R22: library part "RES 255k 0805", "0805 Resistor, 6A, 0.125W, 25ppm, 0.1%, 255K", Case Code (Imperial)=0805, Case Code (Metric)=2012, Manufacturer=Panasonic, Manufacturer Part Number=ERA-6AEB2553V, Max Operating Temperature=155°C, Max Power Dissipation=125mW, Min Operating Temperature=-55°C, Package Quantity=1, Resistance=255kR, Supplier Part Number 1=P255KDACT-ND, Temperature Coefficient=25ppm/°C, Tolerance=0.1%, Voltage Rating=200V, Voltage Rating (DC)=100V, Case/Package=0805, Category="Chip SMD Resistors", ComponentLink1Description=https://datasheet.ciiva.com/11810/0900766b80eb1d8c-11810615.pdf?src-supplier=RSComponents, ComponentLink1URL=https://datasheet.ciiva.com/11810/0900766b80eb1d8c-11810615.pdf?src-supplier=RSComponents, ComponentLink2Description=https://datasheet.ciiva.com/41450/001181380-da-01-en-widerstand-era-0805-255k-0-1-5000st-41450539.pdf?src-supplier=Conrad, ComponentLink2URL=https://datasheet.ciiva.com/41450/001181380-da-01-en-widerstand-era-0805-255k-0-1-5000st-41450539.pdf?src-supplier=Conrad, ComponentLink3Description=https://datasheet.ciiva.com/5981/485442-5981317.pdf?src-supplier=Farnell, ComponentLink3URL=https://datasheet.ciiva.com/5981/485442-5981317.pdf?src-supplier=Farnell, ComponentLink4Description=https://datasheet.ciiva.com/5981/485442-5981318.pdf?src-supplier=Farnell, ComponentLink4URL=https://datasheet.ciiva.com/5981/485442-5981318.pdf?src-supplier=Farnell, ComponentLink5Description=https://datasheet.ciiva.com/5981/485442-5981319.pdf?src-supplier=Farnell, ComponentLink5URL=https://datasheet.ciiva.com/5981/485442-5981319.pdf?src-supplier=Farnell, ComponentLink6Description=https://datasheet.ciiva.com/5981/485442-5981320.pdf?src-supplier=Farnell, ComponentLink6URL=https://datasheet.ciiva.com/5981/485442-5981320.pdf?src-supplier=Farnell, ComponentLink7Description=https://datasheet.ciiva.com/17206/aoa0000ce26-17206655.pdf?src-supplier=Avnet+Europe, ComponentLink7URL=https://datasheet.ciiva.com/17206/aoa0000ce26-17206655.pdf?src-supplier=Avnet+Europe, Composition="Metal Film,Thin Film", Contact Plating=Tin, Depth=1.25mm, Features="Automotive AEC-Q200", Height=0.5mm, Lead Free="Lead Free", Length=2mm, Military Standard=Not, Mount="Surface Mount", Number of Pins=2, Number of Terminations=2, Packaging="Tape and Reel", Power Rating=125mW, Pricing 1="1=0.36000, 10=0.30200, 100=0.11820, 1000=0.04948, 2500=0.04536 (USD)", Radiation Hardening=No, REACH SVHC="No SVHC", RoHS=Yes, Stock 1=7869, Supplier 1=Digi-Key, Termination=SMD/SMT, Weight=0.000194oz, Width=1.25mm
R23: library part "RES 330k 1/8W - 1%", "RES SMD 274K OHM 1% 1/8W 0805"
R24: library part "RES 495k 1/8W", "RES SMD 499K OHM 1% 1/8W 0805", Case Code (Imperial)=0805, Case Code (Metric)=2012, Manufacturer=Yageo, Manufacturer Part Number=RC0805FR-07499KL, Max Operating Temperature=155°C, Min Operating Temperature=-55°C, Power Rating=125mW, Resistance=499kR, Supplier Part Number 1=311-499KCRCT-ND, Temperature Coefficient=100ppm/°C, Tolerance=1%, Voltage Rating=150V, Case/Package=0805, Category="Chip SMD Resistors", ComponentLink1Description=https://datasheet.ciiva.com/15189/getdatasheetpartid-326570-15189975.pdf?src-supplier=Verical, ComponentLink1URL=https://datasheet.ciiva.com/15189/getdatasheetpartid-326570-15189975.pdf?src-supplier=Verical, Composition="Thick Film", Contact Plating=Tin,Lead,Matte, Depth=1.25mm, Lead Free="Lead Free", Length=2mm, Military Standard=Not, Packaging="Tape and Reel", Pricing 1="1=0.10000, 10=0.04000, 100=0.01630, 1000=0.00731, 2500=0.00635 (USD)", Radiation Hardening=No, RoHS=Yes, Stock 1=2275, Supplier 1=Digi-Key, Termination=SMD/SMT, Voltage Rating (DC)=150V
R25 R31: library part "RES 25.5k 1/8W", "RES SMD 25.5K OHM 0.1% 1/8W 0805", Case Code (Imperial)=0805, Case Code (Metric)=2012, Manufacturer=Panasonic, Manufacturer Part Number=ERA-6AEB2552V, Max Operating Temperature=155°C, Max Power Dissipation=125mW, Min Operating Temperature=-55°C, Package Quantity=1, Resistance=25.5kR, Supplier Part Number 1=P25.5KDACT-ND, Temperature Coefficient=25ppm/°C, Tolerance=0.1%, Voltage Rating=100V, Case/Package=0805, Category="Chip SMD Resistors", ComponentLink1Description=https://datasheet.ciiva.com/11810/0900766b80eb1d8c-11810651.pdf?src-supplier=RSComponents, ComponentLink1URL=https://datasheet.ciiva.com/11810/0900766b80eb1d8c-11810651.pdf?src-supplier=RSComponents, ComponentLink2Description=https://datasheet.ciiva.com/26335/459526-da-01-en-widerstand-0805-era-26335831.pdf?src-supplier=Conrad, ComponentLink2URL=https://datasheet.ciiva.com/26335/459526-da-01-en-widerstand-0805-era-26335831.pdf?src-supplier=Conrad, ComponentLink3Description=https://datasheet.ciiva.com/7870/485442-7870651.pdf?src-supplier=Element14, ComponentLink3URL=https://datasheet.ciiva.com/7870/485442-7870651.pdf?src-supplier=Element14, ComponentLink4Description=https://datasheet.ciiva.com/5987/485442-5987308.pdf?src-supplier=Farnell, ComponentLink4URL=https://datasheet.ciiva.com/5987/485442-5987308.pdf?src-supplier=Farnell, ComponentLink5Description=https://datasheet.ciiva.com/7870/485442-7870652.pdf?src-supplier=Element14, ComponentLink5URL=https://datasheet.ciiva.com/7870/485442-7870652.pdf?src-supplier=Element14, ComponentLink6Description=https://datasheet.ciiva.com/30151/54aoa0000ce26-30151583.pdf?src-supplier=Onlinecomponents.com, ComponentLink6URL=https://datasheet.ciiva.com/30151/54aoa0000ce26-30151583.pdf?src-supplier=Onlinecomponents.com, ComponentLink7Description=https://datasheet.ciiva.com/9191/aoa0000ce26-9191422.pdf?src-supplier=Avnet, ComponentLink7URL=https://datasheet.ciiva.com/9191/aoa0000ce26-9191422.pdf?src-supplier=Avnet, Composition="Metal Film,Thin Film", Contact Plating=Tin, Depth=1.25mm, Features="Automotive AEC-Q200", Height=0.5mm, Lead Free="Lead Free", Length=2mm, Military Standard=Not, Mount="Surface Mount", Number of Pins=2, Number of Terminations=2, Packaging="Tape and Reel", Power Rating=125mW, Pricing 1="1=0.36000, 10=0.30200, 100=0.11820, 1000=0.04948, 2500=0.04536 (USD)", Radiation Hardening=No, RoHS=Yes, Stock 1=5872, Supplier 1=Digi-Key, Termination=Solder, Voltage Rating (DC)=100V, Width=1.25mm
R30: library part "RES 11.5k 1/8W", "RES SMD 11.5K OHM 0.1% 1/8W 0805 Thin Film", Case Code (Imperial)=0805, Case Code (Metric)=2012, Manufacturer=Panasonic, Manufacturer Part Number=ERA-6AEB1152V, Max Operating Temperature=155°C, Max Power Dissipation=125mW, Min Operating Temperature=-55°C, Package Quantity=1, Resistance=11.5kR, Supplier Part Number 1=P11.5KDACT-ND, Temperature Coefficient=25ppm/°C, Tolerance=0.1%, Voltage Rating=100V, Case/Package=0805, Category="Chip SMD Resistors", ComponentLink1Description=https://datasheet.ciiva.com/11810/0900766b80eb1d8c-11810868.pdf?src-supplier=RSComponents, ComponentLink1URL=https://datasheet.ciiva.com/11810/0900766b80eb1d8c-11810868.pdf?src-supplier=RSComponents, ComponentLink2Description=https://datasheet.ciiva.com/41450/001181306-da-01-en-widerstand-era-0805-11k5-0-1-5000st-41450464.pdf?src-supplier=Conrad, ComponentLink2URL=https://datasheet.ciiva.com/41450/001181306-da-01-en-widerstand-era-0805-11k5-0-1-5000st-41450464.pdf?src-supplier=Conrad, ComponentLink3Description=https://datasheet.ciiva.com/5987/485442-5987301.pdf?src-supplier=Farnell, ComponentLink3URL=https://datasheet.ciiva.com/5987/485442-5987301.pdf?src-supplier=Farnell, ComponentLink4Description=https://datasheet.ciiva.com/7829/485442-7829142.pdf?src-supplier=Element14, ComponentLink4URL=https://datasheet.ciiva.com/7829/485442-7829142.pdf?src-supplier=Element14, ComponentLink5Description=https://datasheet.ciiva.com/17211/aoa0000ce26-17211855.pdf?src-supplier=Avnet+Europe, ComponentLink5URL=https://datasheet.ciiva.com/17211/aoa0000ce26-17211855.pdf?src-supplier=Avnet+Europe, ComponentLink6Description=https://datasheet.ciiva.com/7829/485442-7829143.pdf?src-supplier=Element14, ComponentLink6URL=https://datasheet.ciiva.com/7829/485442-7829143.pdf?src-supplier=Element14, ComponentLink7Description=https://datasheet.ciiva.com/9193/aoa0000ce26-9193735.pdf?src-supplier=Avnet, ComponentLink7URL=https://datasheet.ciiva.com/9193/aoa0000ce26-9193735.pdf?src-supplier=Avnet, ComponentLink8Description=https://datasheet.ciiva.com/24024/aoa0000ce26-197354-24024328.pdf?src-supplier=Mouser, ComponentLink8URL=https://datasheet.ciiva.com/24024/aoa0000ce26-197354-24024328.pdf?src-supplier=Mouser, Composition="Thin Film,Metal Film", Contact Plating=Tin, Depth=1.25mm, Features="Automotive AEC-Q200", Height=0.5mm, Lead Free="Lead Free", Length=2mm, Military Standard=Not, Mount="Surface Mount", Number of Pins=2, Number of Terminations=2, Packaging="Tape and Reel", Power Rating=125mW, Pricing 1="1=0.34000, 10=0.28800, 100=0.11260, 1000=0.04712, 2500=0.04320 (USD)", Radiation Hardening=No, RoHS=Yes, Stock 1=10661, Supplier 1=Digi-Key, Termination=Solder, Voltage Rating (DC)=100V, Width=1.25mm
R32: library part "RES 16m 1/2W", "RES SMD 0.016 OHM 1% 1/2W 0805 Thick Film", Case Code (Imperial)=0805, Case Code (Metric)=2012, Manufacturer=Panasonic, Manufacturer Part Number=ERJ-6BWFR016V, Max Operating Temperature=155°C, Max Power Dissipation=500mW, Min Operating Temperature=-55°C, Package Quantity=1, Resistance=16mR, Supplier Part Number 1=P.016AQCT-ND, Temperature Coefficient=200ppm/°C, Tolerance=1%, Case/Package=0805, Category="Chip SMD Resistors", ComponentLink1Description=https://datasheet.ciiva.com/11808/0900766b8126441d-11808690.pdf?src-supplier=RSComponents, ComponentLink1URL=https://datasheet.ciiva.com/11808/0900766b8126441d-11808690.pdf?src-supplier=RSComponents, ComponentLink2Description=https://datasheet.ciiva.com/2452/aoa0000ce3-2452594.pdf?src-supplier=Digi-Key, ComponentLink2URL=https://datasheet.ciiva.com/2452/aoa0000ce3-2452594.pdf?src-supplier=Digi-Key, ComponentLink3Description=https://datasheet.ciiva.com/2452/aoa0000ce3-2452592.pdf?src-supplier=Digi-Key, ComponentLink3URL=https://datasheet.ciiva.com/2452/aoa0000ce3-2452592.pdf?src-supplier=Digi-Key, ComponentLink4Description=https://datasheet.ciiva.com/2452/aoa0000ce3-2452593.pdf?src-supplier=Digi-Key, ComponentLink4URL=https://datasheet.ciiva.com/2452/aoa0000ce3-2452593.pdf?src-supplier=Digi-Key, ComponentLink5Description=https://datasheet.ciiva.com/9192/aoa0000ce3-9192761.pdf?src-supplier=Avnet, ComponentLink5URL=https://datasheet.ciiva.com/9192/aoa0000ce3-9192761.pdf?src-supplier=Avnet, ComponentLink6Description=https://datasheet.ciiva.com/17211/aoa0000ce3-17211370.pdf?src-supplier=Avnet+Europe, ComponentLink6URL=https://datasheet.ciiva.com/17211/aoa0000ce3-17211370.pdf?src-supplier=Avnet+Europe, Composition="Thick Film", Contact Plating=Tin, Depth=1.25mm, Features="Automotive AEC-Q200", Height=0.028inch, Lead Free="Lead Free", Length=2mm, Military Standard=Not, Mount="Surface Mount", Number of Pins=2, Number of Terminations=2, Packaging="Tape and Reel", Power Rating=500mW, Pricing 1="1=0.65000, 10=0.53800, 100=0.36140, 1000=0.21148, 2500=0.20917 (USD)", Radiation Hardening=No, RoHS=Yes, Stock 1=4585, Supplier 1=Digi-Key, Termination=SMD/SMT, Width=0.049inch
R33: library part "RES 1.05k 1/8W", "RES SMD 1.05K OHM 0.1% 1/8W 0805", Package=0805, Supplier Part Number 1=P1.05KDACT-ND, Tolerance=0.1%, Supplier 1=Digi-Key, Wattage=0.125W
R34 R36: library part "RES 18k 1W", "RES SMD 18K OHM 5% 1W 2512", Package=0805, Power (Watts)=1W, Tolerance=5%
R35 R38: library part "RES 5.1M 1/8W-5%", "RES SMD 5.1 MOHM 5% 1/8W 0805", Package=0805, Power (Watts)=0.125W, Tolerance=5%
R37: library part "RES 1.5k 50W", "RES SMD 1.5K OHM 1% 50W D2PAK", Package="D2PAK (TO-263)", Power (Watts)=50W, Tolerance=1%
R39: library part "RES 270k 1/8W", "RES SMD 270K OHM 5% 1/8W 0805", Package=0805, Power (Watts)=0.125W, Tolerance=5%
R41 R42 R43: library part "RES 330k 1/8W - 5%", "RES SMD 330K OHM 5% 1/8W 0805", Package=0805, Power (Watts)=0.125W, Tolerance=5%
R44: library part "RES 13k 1/8W", "RES SMD 13K OHM 5% 1/8W 0805", Package=0805, Power (Watts)=0.125W, Tolerance=5%
Rsense1: library part "RES 2m 1W", "RES SMD 2m OHM 1% 1W 1206", Package=1206, Power (Watts)=1W, Tolerance=1%, Resistance=2mOHM
S1: library part "SW ROCKER", "Rocker Switch SPST 10A (AC) 125V Panel Mount, Snap-In", Rating="10A 125V", ComponentLink1Description=Digikey, ComponentLink1URL=https://www.digikey.ca/product-detail/en/zf-electronics/SRB22A2FBBNN/CH755-ND/446021, ComponentLink2Description=Datasheet, ComponentLink2URL=http://switches-sensors.zf.com/us/wp-content/uploads/sites/7/2012/10/Rocker_SRB_Datasheet1.pdf, Digikey=CH755-ND, Digikey Link=https://www.digikey.ca/product-detail/en/zf-electronics/SRB22A2FBBNN/CH755-ND/446021, MF="ZF Electronics", MP=SRB22A2FBBNN, Price="1.276 CAD"
T1: "Audio Transformers / Signal Transformers DA2032 Cap Chrgr For Linear LT3750/51", Supplier Part Number 1=994-DA2034-ALB, Supplier 1=Mouser
U1: library part "IC INA226AIDGSR", "36-V, Bi-Directional, Ultra-High Accuracy, Low-/High-Side, I2C Out Current/Power Monitor w/ Alert 10-VSSOP -40 to 125", Package="MSOP-10 Texas Instruments", Supplier Part Number 1=296-29034-6-ND, Digikey=296-29034-1-ND, Digikey Link=https://www.digikey.ca/product-detail/en/texas-instruments/INA226AIDGSR/296-29034-1-ND/2687118, MF="Texas Instruments", MP=INA226AIDGSR, Price=None, SnapEDA_Link=https://www.snapeda.com/parts/INA226AIDGSR/Texas%20Instruments/view-part/53552/?ref=snap, Supplier 1=Digi-Key
U2: "Buck Switching Regulator IC Positive Adjustable 0.8V 1 Output 5A 8-PowerSOIC _0.154, 3.90mm Width_", Package="SO-8 Texas Instruments", Supplier Part Number 1=296-36206-5-ND, MF="Texas Instruments", MP=TPS54531DDA, Price=None, SnapEDA_Link=https://www.snapeda.com/parts/TPS54531DDA/Texas%20Instruments/view-part/289535/?ref=snap, Supplier 1=Digi-Key
U3: "Buck Switching Regulator IC Positive Adjustable 0.76V 1 Output 3A SOT-23-6 Thin, TSOT-23-6", Package="TSOT-23 Texas Instruments", Supplier Part Number 1=296-43663-1-ND, Availability=Unavailable, MF="Texas Instruments", MP=TPS563200DDCR, Price=None, SnapEDA_Link=https://www.snapeda.com/parts/TPS563200DDCR/Texas%20Instruments/view-part/71685/?ref=snap, Supplier 1=Digi-Key
U4: "Linear Voltage Regulator IC Positive Fixed 1 Output  1A TO-252-3", Package=TO-252-3, Supplier Part Number 1=ZLDO1117K33DICT-ND, Digikey=ZLDO1117K33DIDKR-ND, Digikey Link=https://www.digikey.ca/product-detail/en/diodes-incorporated/ZLDO1117K33TC/ZLDO1117K33DIDKR-ND/2095639, MF="Diodes Incorporated", MP=ZLDO1117K33TC, Supplier 1=Digi-Key